# Altium PCB PCB1.PcbDoc
Units mil, origin at the board's own origin, x right, y up, seen from the top; angles counter-clockwise.
Board outline 2891.71 x 2891.71 mil, 2 copper layers (Top Layer, Bottom Layer); 25 components, 7 nets, 53 pads, 0 vias.
Unrouted connection lines stored in the file: 19.
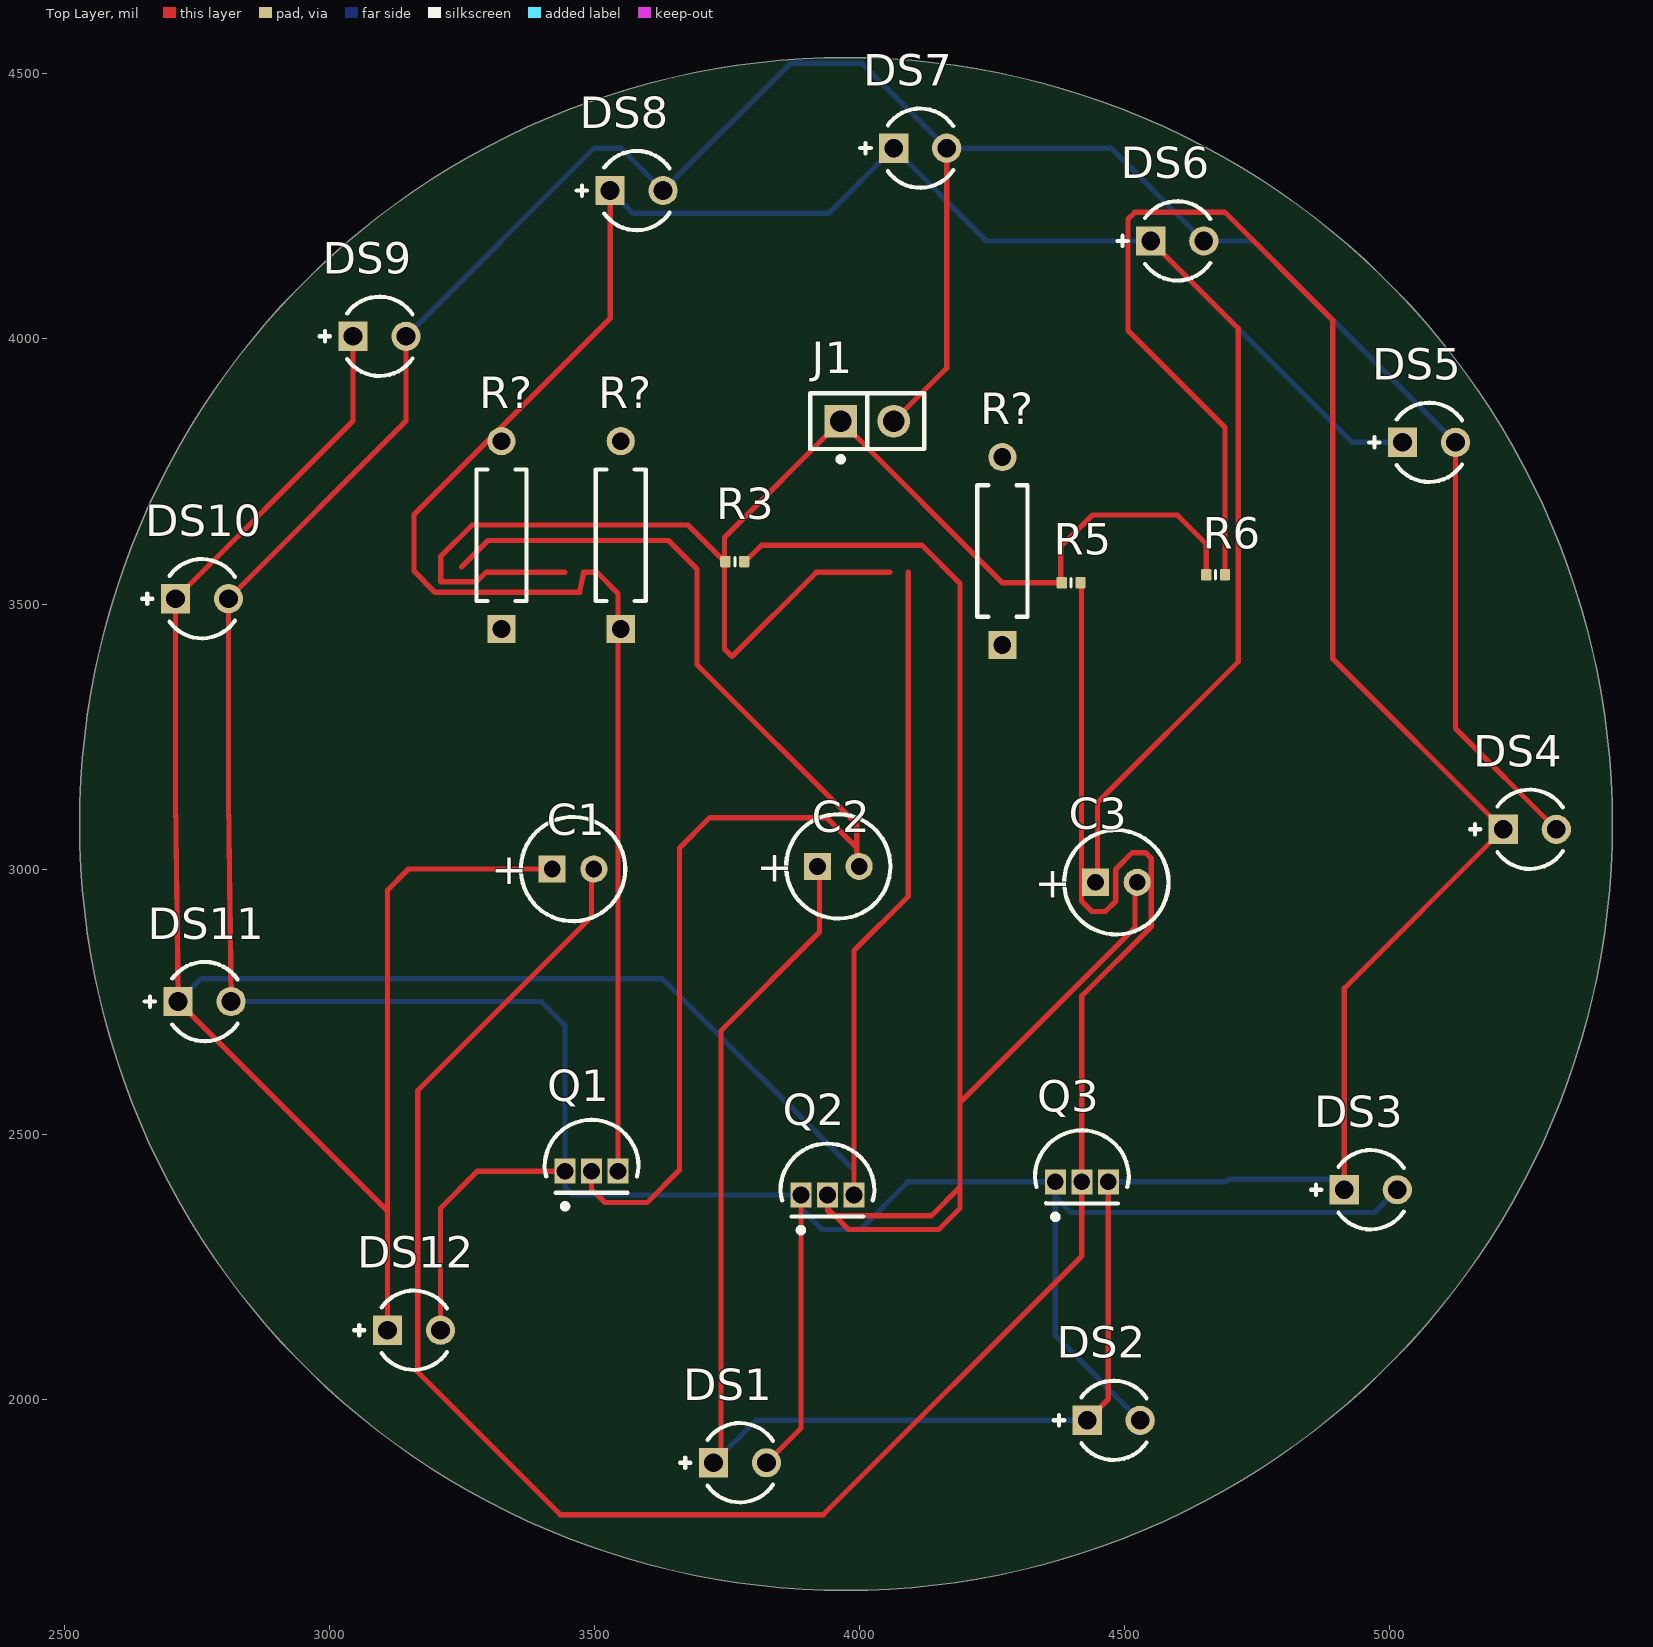
[diagram p0: Top Layer view]
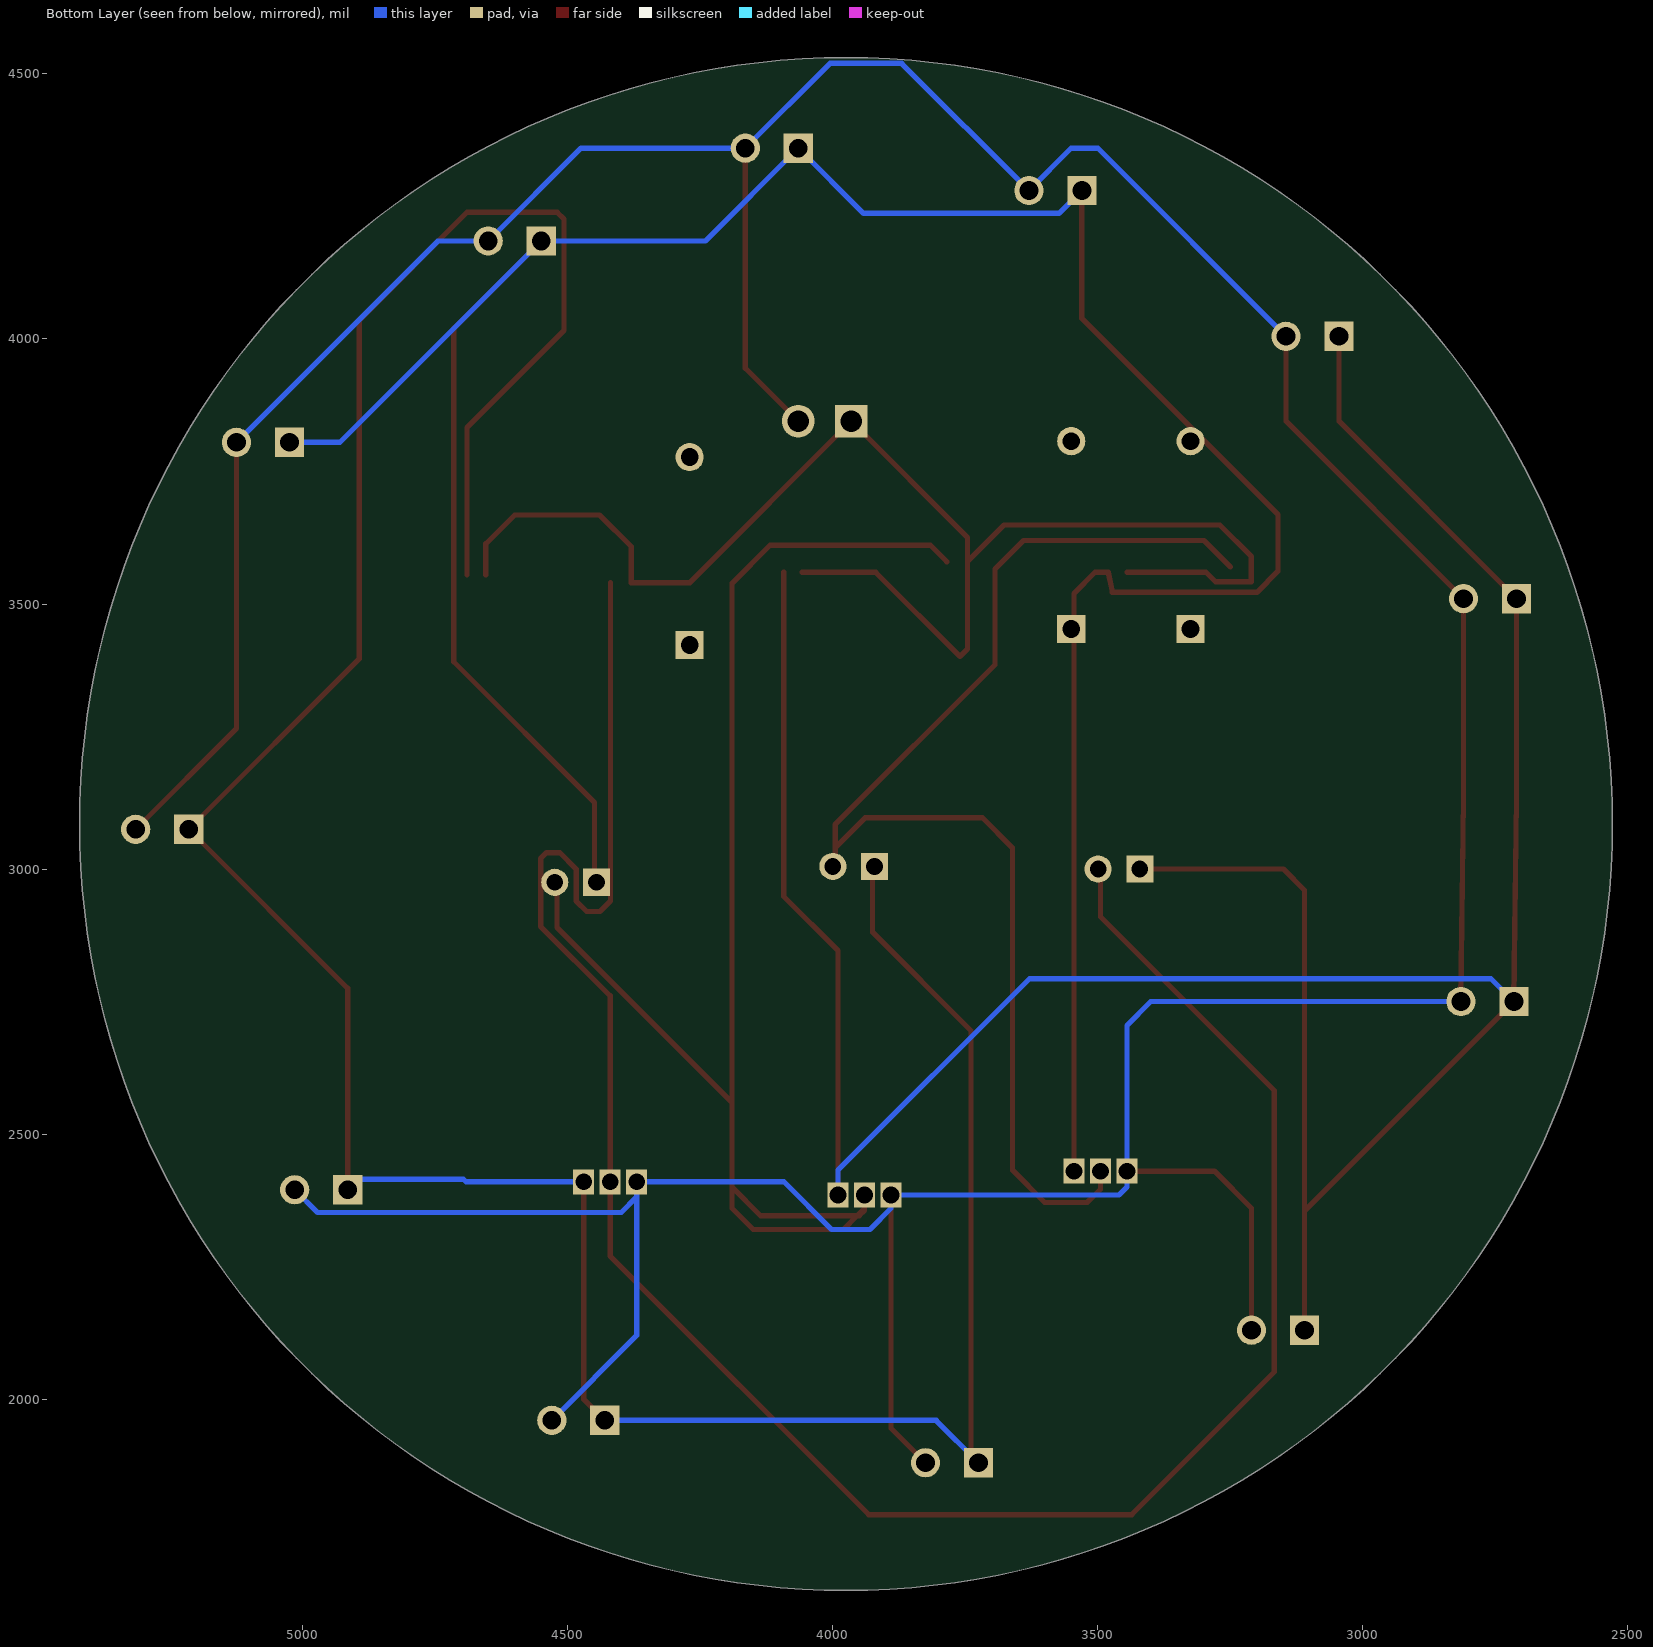
[diagram p1: Bottom Layer view, seen from below]

## Layer stack, top to bottom
Top Solder: solder mask 0.4, Solder Resist, Dk 3.5
Top Layer: signal copper 1.4
Dielectric 1: dielectric 12.6, FR-4, Dk 4.8
Bottom Layer: signal copper 1.4
Bottom Solder: solder mask 0.4, Solder Resist, Dk 3.5

## Board outline
2529.14,3085 ccw(c3975,3085) 3975,1639.14 ccw(c3975,3085) 5420.86,3085 ccw(c3975,3085) 3975,4530.86 ccw(c3975,3085)

## Design rules (kind name [scope] priority, off if disabled: settings)
Clearance [All] p1: gap=10 ignorepadtopadclearanceinfootprint=FALSE
PolygonConnect [All] p1: connectstyle=Relief reliefconductorwidth=10 reliefentries=4 polygonreliefangle="90 Angle" airgapwidth=10
RoutingVias [All] p1: holewidth=28 width=50 viastyle="Through Hole" minholewidth=28 minwidth=50 maxholewidth=28 maxwidth=50
SolderMaskExpansion [All] p1: expansion=0 istentingtop=FALSE
SupplyNets "Schematic Supply Nets" [InNet('GND')] p1: voltage=0.000
Width [All] p1: maxlimit=10 minlimit=10 preferedwidth=10
30 further rules are at their usual default settings.

## Classes and differential pairs
component class "Hw lab": C1 C2 C3 DS1 DS2 DS3 DS4 DS5 DS6 DS7 DS8 DS9 DS10 DS11 DS12 J1 Q1 Q2 Q3 R3 R5 R6 R?

## Components (designator, comment, footprint, x,y, rotation, side; value= is the part's Value field where it differs from the comment)
C1 "ECA1HM220" CAPPR55-200-1100X500X1200 3460,3000 r0 top value=22µF
C2 "ECA1HM220" CAPPR55-200-1100X500X1200 3960.43,3005 r0 top value=22µF
C3 "ECA1HM220" CAPPR55-200-1100X500X1200 4485,2975 r0 top value=22µF
DS1 "LTL-1CHE" INDPR60-254-520X380X650 3775,1880 r0 top
DS2 "LTL-1CHE" INDPR60-254-520X380X650 4480,1960 r0 top
DS3 "LTL-1CHE" INDPR60-254-520X380X650 4965,2395 r0 top
DS4 "LTL-1CHE" INDPR60-254-520X380X650 5265,3075 r0 top
DS5 "LTL-1CHE" INDPR60-254-520X380X650 5075,3805 r0 top
DS6 "LTL-1CHE" INDPR60-254-520X380X650 4600,4185 r0 top
DS7 "LTL-1CHE" INDPR60-254-520X380X650 4115,4360 r0 top
DS8 "LTL-1CHE" INDPR60-254-520X380X650 3580,4280 r0 top
DS9 "LTL-1CHE" INDPR60-254-520X380X650 3095,4005 r0 top
DS10 "LTL-1CHE" INDPR60-254-520X380X650 2760,3510 r0 top
DS11 "LTL-1CHE" INDPR60-254-520X380X650 2765,2750 r0 top
DS12 "LTL-1CHE" INDPR60-254-520X380X650 3160,2130 r0 top
J1 "TSW-102-14-G-S" FP-TSW-102-14-G-S-MFG 4015,3845 r0 top
Q1 "S9013" JSCJ-TO-92-3_V 3495,2430 r0 top
Q2 "S9013" JSCJ-TO-92-3_V 3940,2385 r0 top
Q3 "S9013" JSCJ-TO-92-3_V 4420,2410 r0 top
R3 "330R2J" RESC0402(1005)_L 3765.31,3580 r0 top value=330
R5 "330R2J" RESC0402(1005)_L 4399.69,3540 r0 top value=330
R6 "330R2J" RESC0402(1005)_L 4672.28,3555 r0 top value=330
R? "MFR-25FBF52-10K" RESA60-630X240 3550,3630 r90 top value=10k
R? "MFR-25FBF52-10K" RESA60-630X240 3325,3630 r90 top value=10k
R? "MFR-25FBF52-10K" RESA60-630X240 4270,3600 r90 top value=10k

## Footprints (in the part's own frame and the unit in brackets; to place one, negate y for a bottom-side part, rotate by r counter-clockwise, add the part's x,y. Pads: shape width x height; smd on the part's side, far side on the other; paste and mask are expansions set on the pad)
CAPPR55-200-1100X500X1200 [mm] "THD, 2-Leads, Dia 5mm, Pin Spacing 2mm"
  rect 1.3x1.3 hole 0.8: 1(-1,0)
  round 1.3 hole 0.8: 2(1,0)
  silkscreen extent -2.5,-2.5 2.5,2.5, body extent -2.5,-2.5 2.45,2.5, height 12
FP-TSW-102-14-G-S-MFG [mm]
  rect 1.57x1.57 hole 1.02 paste-2539.97 mask+0: 1(-1.27,0)
  round 1.57 hole 1.02 paste-2539.97 mask+0: 2(1.27,0)
  silkscreen extent -2.73,-1.95 2.73,1.34, body extent -2.83,-1.44 2.83,1.44, height 0.25
INDPR60-254-520X380X650 [mm] "THD, 2-Leads, Dia 3.8mm, Pitch 2.54mm"
  rect 1.4x1.4 hole 0.9: 1(-1.27,0)
  round 1.4 hole 0.9: 2(1.27,0)
  silkscreen extent -2.87,-1.9 1.58,1.9, body extent -1.9,-1.9 1.9,1.9, height 6.5
JSCJ-TO-92-3_V [mm] "TO-92, 3-leads, Height 4.7mm, Pitch 1.27mm"
  rect 1x1.2 hole 0.8: 1(-1.27,0) 2(0,0) 3(1.27,0)
  silkscreen extent -2.25,-1.81 2.25,2.47, body extent -2.25,-1.03 2.25,2.47, height 4.7
RESA60-630X240 [mm] "Axial Resistor, 2-Leads, Dia 2.4mm, Body Length 6.3mm"
  rect 1.35x1.35 hole 0.85: 1(-4.5,0)
  round 1.35 hole 0.85: 2(4.5,0)
  silkscreen extent -3.15,-1.2 3.15,1.2, body extent -4.77,-1.19 4.77,1.2, height 2.4
RESC0402(1005)_L [mm] "Chip Resistor, Body 1.0x0.5mm, IPC High Density"
  rrect25% 0.5x0.55 smd: 1(-0.45,0) 2(0.45,0)
  silkscreen extent 0,-0.2 0,0.2, body extent -0.5,-0.25 0.5,0.25, height 0.3

## Part data
C1 C2 C3: library part CMP-001-00027-7, "Aluminum Electrolytic Capacitor, 22 uF, +/- 20%, 50 V, -40 to 85 degC, 2-Pin THD, RoHS, Bulk", Capacitor Type=Electrolytic, Case/Package=Radial, Manufacturer=Panasonic, Max Operating Temperature=85°C, Min Operating Temperature=-40°C, Package Description="2-Pin Radial Lead, Dia 5 mm, Height 12 mm", Package Quantity=200, Package Reference=CAPPR55-200-1100X500X1200, Ripple Current=100mA, Tolerance=20%, Voltage Rating=50V, Datasheet URL=https://industrial.panasonic.com/cdbs/www-data/pdf/RDF0000/ABA0000C1218.pdf, Datasheet Version="Rev. 05, 10/2016", Diameter=5mm, Lead Pitch=2mm, Manufacturer URL=http://www.panasonic.com/, Mounting Technology=TH, Packaging=Bulk, Pins=2, Ripple Current (AC)=100mA, RoHS Compliant=True
DS1 DS2 DS3 DS4 DS5 DS6 DS7 DS8 DS9 DS10 DS11 DS12: library part CMP-007-00018-2, "LED Uni-Color Red, 100 mW, 30 mA, -55 to 100 degC, 2-Pin THD, RoHS, Bulk", Case/Package=Radial, Colour=Red, Forward Current=20mA, Forward Voltage=2V, Manufacturer=Lite-On, Max Operating Temperature=100°C, Min Operating Temperature=-55°C, Package Description="2-Pin Through Hole Device, Dia 3.8 mm, Pitch 2.54 mm", Package Quantity=1000, Datasheet URL=https://datasheet.ciiva.com/15117/getdatasheetpartid-187746-15117985.pdf, Datasheet Version=Dec-03, Illumination Colour=Red, Lens Style=Dome, Luminous Intensity=12.6mcd, Manufacturer URL=http://www.us.liteon.com/, Mounting Technology=TH, Nominal Vf=2V, Package Reference=LTL-1CHE, Packaging=Bulk, Pins=2, RoHS Compliant=True, Viewing Angle=60degrees
J1: library part CMP-002-00071-1, "TSW - Samtec 2.54mm Pin Header 13.46mm Overall Pin Length 2.79mm Tail (14) - Fast Stock(mcv)"
Q1 Q2 Q3: library part CMP-013-00000-3, "Transistor, NPN, 0.1 uA, 150 MHz, 3-Pin TO-92", Case/Package=TO-92-3, Manufacturer="Jiangsu Changjiang Electronics Technology", Package Description="3-Pin Through Hole Device, Height 4.7 mm, Pitch 2.3 mm", Datasheet URL=http://www.cj-elec.com/txUpfile/20121910315050632.pdf, Datasheet Version="Rev. B, 11/2011", Mounting Technology=TH, Package Reference=TO-92-3, RoHS Compliant=False
R3 R5 R6: library part CMP-009-00095-2, "330R 0.063W 5% 0402 (1005 Metric)  SMD", Case/Package=0402, Power=63mW, Tolerance=5%, Mounting Technology=SMT, Pins=2
R? R? R?: library part CMP-009-00047-4, "Axial Resistor, 10 KOhm, +/- 1%, 0.25 W, -55 to 155 degC, 2-Pin THD, RoHS, Bulk", Case/Package=Axial, Manufacturer=Yageo, Max Operating Temperature=155°C, Min Operating Temperature=-55°C, Package Description="2-Pin Axial Lead, Dia 2.4 mm, Body Length 6.3 mm", Package Quantity=200, Package Reference=MFR-25, Power=250mW, Tolerance=1%, Voltage Rating=250V, Datasheet URL=http://www.yageo.com/documents/recent/Yageo%20LR_MFR_2013.pdf, Datasheet Version=Apr-13, Manufacturer URL=http://www.yageo.com/, Mounting Technology=TH, Packaging=Bulk, RoHS Compliant=True

## Nets (pads, with @x,y where several pads share a name; then routed paths per layer and width w, separated by ;. In a path a pad name is that pad's centre, name@x,y a point inside that pad or via, vN(x,y) a via of type N, cw(c..) or ccw(c..) an arc to the next point about the centre after c; other vN are vias at no path point)
GND: DS1.2 DS2.2 DS3.2 DS4.2 DS5.2 DS6.2 DS7.2 DS8.2 DS9.2 DS10.2 DS11.2 DS12.2 J1.2 Q1.1 Q2.1 Q3.1 | length 9495.4
  Top Layer w10: DS11.2 2810,3135 DS10.2 3145,3845 DS9.2 ; DS12.2 3210,2360 3280,2430 Q1.1 ; DS1.2 3890,1945 Q2.1 ; J1.2 4165,3945 DS7.2 ; DS5.2 5125,3265 DS4.2
  Bottom Layer w10: DS11.2 3400,2750 3445,2705 Q1.1 3445,2400 3460,2385 Q2.1 3890,2360 3930,2320 4002,2320 4092,2410 Q3.1 4370,2381 ; DS9.2 3500,4360 3550,4360 DS8.2 3870,4520 4005,4520 DS7.2 4475,4360 DS6.2 4745,4185 DS5.2 ; DS2.2 4370,2120 4370,2381 ; DS3.2 4972,2352 4399,2352 4370,2381
NetC1_1: C1.1 C2.2 DS5.1 DS6.1 DS7.1 DS8.1 Q1.2 Q1.3 R3.1 R?.1@3325,3452.83 | length 5592.2
  Top Layer w10: DS8.1 3530,4039 3160,3669 3160,3562 3200,3522 3472.43,3522 3480.43,3560 3505,3560 3545,3520 Q1.3 ; 4449.57,2975 4449.57,3125.57 4715,3391 4715,4020 DS6.1
  Bottom Layer w10: DS8.1 3573,4237 3942,4237 DS7.1 4240,4185 DS6.1 4930,3805 DS5.1
NetC1_2: C1.2 DS1.1 DS2.1 DS3.1 DS4.1 Q3.3 R6.1 | length 5988.8
  Top Layer w10: DS1.1 3739,1894 3739,2695 3925,2881 3925,3005 ; DS2.1 4470,2000 Q3.3 ; 4690,3555 4690,3833 4507,4016 4507,4226 4520,4239 4690,4239 4893,4036 4893,3397 DS4.1 4915,2775 DS3.1
  Bottom Layer w10: DS1.1 3805,1960 DS2.1 ; Q3.3 4692,2410 4697,2415 4895,2415 DS3.1
NetC2_1: C2.1 Q2.2 R?.1@3550,3452.83
NetC3_1: C3.1 Q3.2 R?.1@4270,3422.83
NetC3_2: C3.2 DS9.1 DS10.1 DS11.1 DS12.1 Q2.3 R5.1 | length 5820.4
  Top Layer w10: DS9.1 3045,3845 DS10.1 2710,3135 DS11.1 3110,2355 ; DS12.1 3110,2355 ; 3424.57,3000 3150,3000 3110,2960 3110,2355 ; Q2.3 3990,2846 4092.72,2948.72 4092.72,3560
  Bottom Layer w10: DS11.1 2758,2793 3629,2793 3990,2432 Q2.3
NetJ1_1: J1.1 R3.2 R5.2 R6.2 R?.2 | length 2771.8
  Top Layer w10: 3445,3560 3296,3560 3278,3542 3210.32,3542 3210.32,3570 3210.32,3589.32 3270,3649 3676.63,3649 3745.63,3580 ; 4057.28,3560 3919,3560 3760,3401 3745.63,3415.37 3745.63,3580 ; 4654.57,3555 4654.57,3613.43 4600,3668 4440,3668 4380,3608 4380,3540 4270,3540 J1.1 3745.63,3625.63 3745.63,3580
copper on no net: | length 9447.2
  Top Layer w10: 3249.69,3570 3299.69,3620 3640,3620 3694,3566 3694,3385.47 3995.47,3084 3995.47,3040 ; 3495,2430 3495,2396 3520,2371 3600,2371 3661,2432 3661,3040 3718,3097 3938.47,3097 3995.47,3040 ; 3495.04,3000 3495.04,2910 3167,2581.96 3167,2051 3436,1782 3932,1782 4420,2270 4420,2410 4420,2761 4551,2892 4551,3020 4540,3031 4515,3031 4484,3000 4484,2940 4464,2920 4439,2920 4419.37,2939.63 4419.37,3540 ; 3785,3580 3816,3611 4118,3611 4190,3539 4190,2559.96 ; 3940,2385 3940,2360 ; 3995.47,3005 3995.47,3040 ; 4520.04,2975 4520.04,2890 4190,2559.96 ; 3940,2360 3954,2346 ; 3940,2360 3940,2356 3950,2346 3954,2346 ; 3954,2346 3980,2320 4150,2320 4190,2360 4190,2400 ; 3954,2346 4136,2346 4190,2400 ; 4190,2400 4190,2559.96

## Silkscreen, mask and mechanical layers (free items; w line width, h text height)
Mechanical 1:
  circle w10: c3975,3085 r1445.86

## Text inside footprints (layer, text, board x,y; h text height)
C1: Top Overlay "+" at 3306.14,2970.98 h59.06
C2: Top Overlay "+" at 3806.57,2975.98 h59.06
C3: Top Overlay "+" at 4331.14,2945.98 h59.06